# EAGLE board ScannerControlsBreakout (EAGLE 6.3)
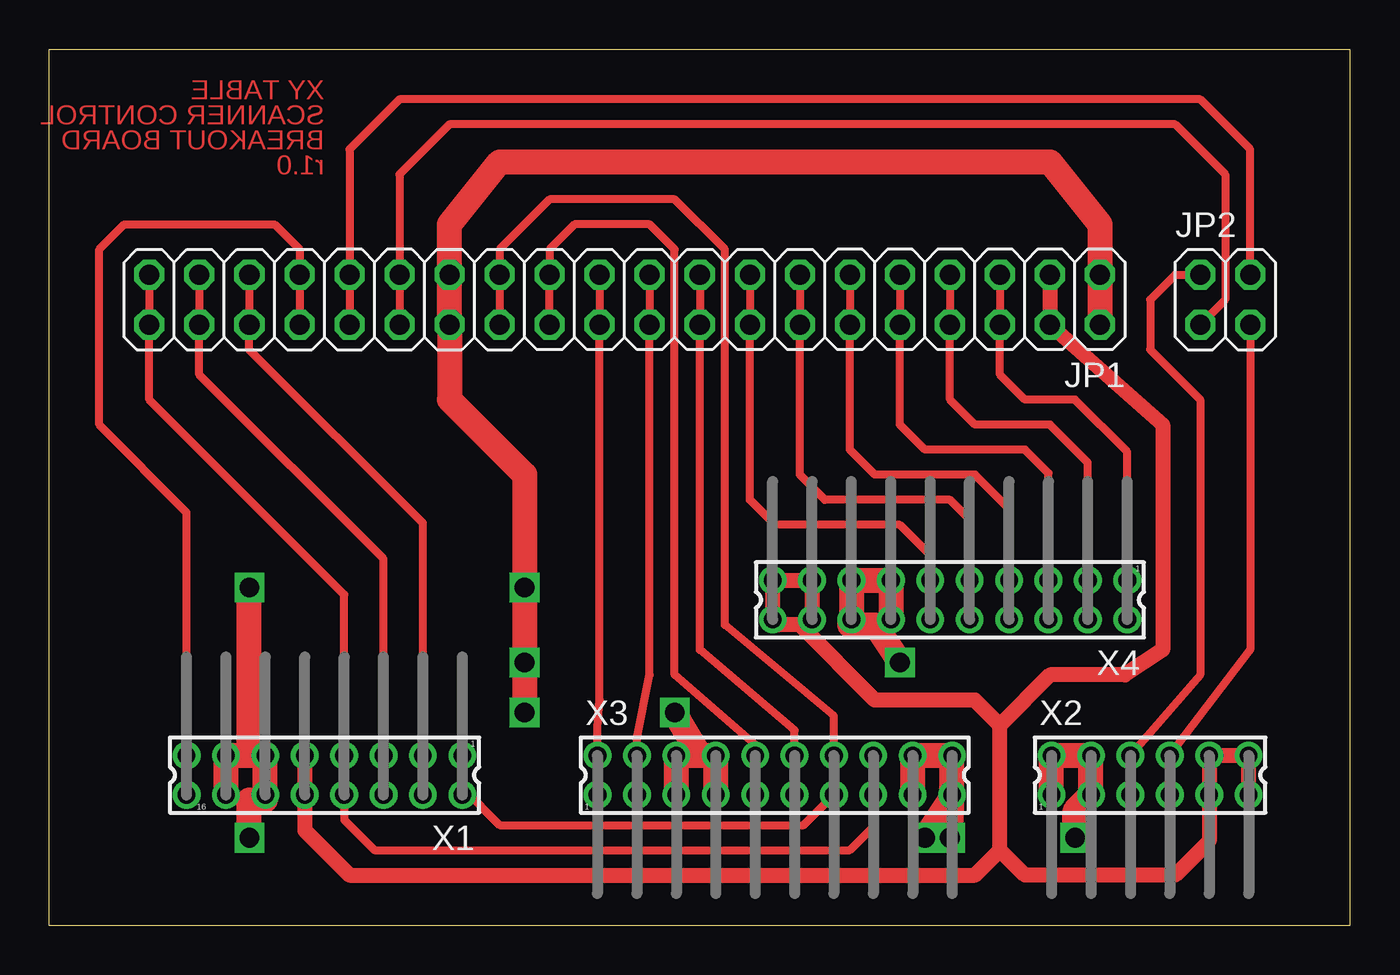
[diagram p0: board, top side]
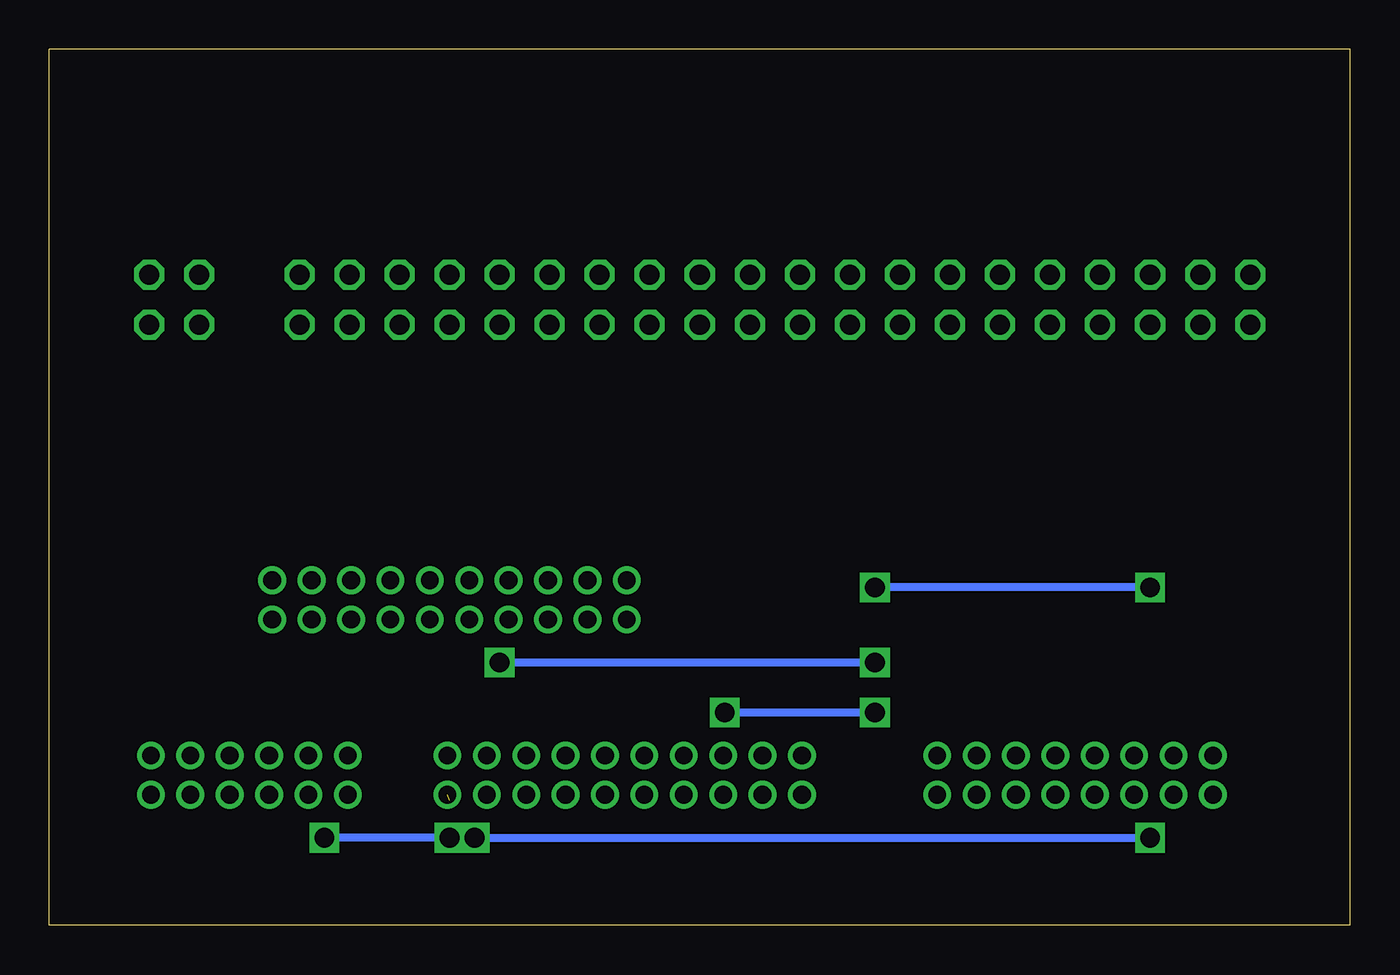
[diagram p1: board, bottom side, seen from below]

Size 66.04 x 44.45 mm. Coordinates in mm from the lower left corner, seen from the top.
Outline: 0,0 66.04,0 66.04,44.45 0,44.45 0,0
Copper layers (1*16): Top 0.035mm / dielectric 1.5mm / Bottom 0.035mm
Design rules "default *": minimum track width 10mil, minimum drill 24mil, track to track 8mil, track to pad 8mil, pad to pad 8mil, via to via 8mil, smd to smd 8mil, copper to edge 40mil, drill to drill 8mil, minimum pad ring 10mil, minimum via ring 10mil, stop-mask expansion 5mil, vias tented up to drill 0mil, thermal gap 10mil

## Footprints (pad centres in the part's own frame; a part is rotated, then mirrored left to right if it is on the bottom)
2X20 = drill 1.016 octagon: 1 -24.13,-1.27; 2 -24.13,1.27; 3 -21.59,-1.27; 4 -21.59,1.27; 5 -19.05,-1.27; 6 -19.05,1.27; 7 -16.51,-1.27; 8 -16.51,1.27; 9 -13.97,-1.27; 10 -13.97,1.27; 11 -11.43,-1.27; 12 -11.43,1.27; 13 -8.89,-1.27; 14 -8.89,1.27; 15 -6.35,-1.27; 16 -6.35,1.27; 17 -3.81,-1.27; 18 -3.81,1.27; 19 -1.27,-1.27; 20 -1.27,1.27; 21 1.27,-1.27; 22 1.27,1.27; 23 3.81,-1.27; 24 3.81,1.27; 25 6.35,-1.27; 26 6.35,1.27; 27 8.89,-1.27; 28 8.89,1.27; 29 11.43,-1.27; 30 11.43,1.27; 31 13.97,-1.27; 32 13.97,1.27; 33 16.51,-1.27; 34 16.51,1.27; 35 19.05,-1.27; 36 19.05,1.27; 37 21.59,-1.27; 38 21.59,1.27; 39 24.13,-1.27; 40 24.13,1.27
2X02 = drill 1.016 octagon: 1 -1.27,-1.27; 2 -1.27,1.27; 3 1.27,-1.27; 4 1.27,1.27
332-16 = drill 0.9 pad 1.27: 1 -7,-1; 2 -7,1; 3 -5,-1; 4 -5,1; 5 -3,-1; 6 -3,1; 7 -1,-1; 8 -1,1; 9 1,-1; 10 1,1; 11 3,-1; 12 3,1; 13 5,-1; 14 5,1; 15 7,-1; 16 7,1
332-12 = drill 0.9 pad 1.27: 1 -5,-1; 2 -5,1; 3 -3,-1; 4 -3,1; 5 -1,-1; 6 -1,1; 7 1,-1; 8 1,1; 9 3,-1; 10 3,1; 11 5,-1; 12 5,1
332-20 = drill 0.9 pad 1.27: 1 -9,-1; 2 -9,1; 3 -7,-1; 4 -7,1; 5 -5,-1; 6 -5,1; 7 -3,-1; 8 -3,1; 9 -1,-1; 10 -1,1; 11 1,-1; 12 1,1; 13 3,-1; 14 3,1; 15 5,-1; 16 5,1; 17 7,-1; 18 7,1; 19 9,-1; 20 9,1

## Placement (x,y rotation side)
JP1  [2X20]  29.21,31.75 180 top
JP2  [2X02]  59.69,31.75 0 top
X1  332-16  [332-16]  13.97,7.62 180 top
X2  332-12  [332-12]  55.88,7.62 0 top
X3  332-20  [332-20]  36.83,7.62 0 top
X4  332-20  [332-20]  45.72,16.51 180 top

## Library data of the parts
JP1 JP2 = pinhead
X1-X4 = con-garry

## Nets
+5V: JP1.3 JP1.4 X1.9 X1.10 X2.9 X2.10 X2.11 X2.12 X4.17 X4.18 X4.19 X4.20
DOWN: JP1.35 JP1.36 X1.3 X1.4
GND: JP1.1 JP1.2 JP1.27 JP1.28 X1.11 X1.12 X1.13 X1.14 X2.1 X2.2 X2.3 X2.4 X3.5 X3.6 X3.7 X3.8 X3.17 X3.18 X3.19 X3.20 X4.13 X4.14 X4.15 X4.16
LEFT: JP1.25 JP1.26 X1.1 X1.2 X3.13 X3.14
N$1: JP2.3 X2.7 X2.8
N$6: JP1.15 JP1.16 X4.11 X4.12
N$7: JP1.13 JP1.14 X4.9 X4.10
N$8: JP1.11 JP1.12 X4.7 X4.8
N$10: JP1.7 JP1.8 X4.3 X4.4
N$16: JP1.31 JP1.32 JP2.4
N$23: JP1.29 JP1.30 JP2.1
N$31: JP2.2 X2.5 X2.6
N$35: JP1.21 JP1.22 X3.1 X3.2
N$36: JP1.19 JP1.20 X3.3 X3.4
N$39: JP1.23 JP1.24 X3.9 X3.10
N$40: JP1.17 JP1.18 X3.11 X3.12
N$45: JP1.5 JP1.6 X4.1 X4.2
N$47: JP1.9 JP1.10 X4.5 X4.6
RIGHT: JP1.39 JP1.40 X1.7 X1.8 X3.15 X3.16
RST: JP1.33 JP1.34 X1.15 X1.16
UP: JP1.37 JP1.38 X1.5 X1.6

## Tracks (layer width: path | path; a pad name or v marks a point on that pad's centre or on a via)
+5V
  Top 0.406: X1.10 X1.9 | X2.9 X2.10 | 36.99,15.24 X4.20
  Top 0.762: JP1.3 JP1.4 56.52,25.4 56.52,13.97 54.61,12.7 50.8,12.7 48.26,10.16 | X4.20 X4.19 X4.17 X4.18 | X2.11 X2.12 X2.10 58.88,4.27 57.15,2.54 49.53,2.54 48.26,3.81 | X1.9 12.97,4.81 15.24,2.54 46.99,2.54 48.26,3.81 | 48.26,3.81 48.26,10.16 | 48.26,10.16 46.99,11.43 41.91,11.43 38.1,15.24 36.99,15.24
DOWN
  Top 0.406: JP1.35 JP1.36 10.16,29.21 18.97,20.4 X1.4 X1.3
GND  (via drill 1)  (1 unrouted)
  Top 0.406: X4.15 40.72,15.32 40.64,15.24 | 10.97,6.35 X1.12
  Top 1.27: JP1.28 JP1.27 | JP1.2 JP1.1 53.34,35.56 50.8,38.73 22.86,38.73 20.32,35.56 JP1.28 | X1.14 X1.13 10.16,8.62 | X1.12 X1.11 10.16,8.62 | X3.5 X3.6 33.02,8.62 | X3.17 X3.18 X3.20 X3.19 v45.72,4.45 | X3.7 X3.8 33.02,8.62 | X4.16 X4.15 X4.13 X4.14 | X2.1 X2.2 X2.4 X2.3 52.07,5.81 v52.07,4.45 | 40.64,15.24 41.91,15.24 v43.18,13.34 | 10.16,8.62 v10.16,17.14 | v24.13,10.79 v24.13,13.34 v24.13,17.14 24.13,22.86 20.32,26.67 JP1.28 | v31.75,10.79 33.02,8.62 | v44.45,4.45 45.72,6.35 | v10.16,4.45 10.16,6.35 10.97,6.35
  Bottom 0.406: v24.13,10.79 v31.75,10.79 | v10.16,17.14 v24.13,17.14 | v43.18,13.34 v24.13,13.34 | v44.45,4.45 v10.16,4.45 | v45.72,4.45 v52.07,4.45
LEFT
  Top 0.406: JP1.26 JP1.25 22.86,34.29 25.4,36.83 31.75,36.83 34.29,34.29 34.29,15.24 39.83,10.62 X3.14 X3.13 38.29,5.08 22.86,5.08 20.97,6.97 | 20.97,6.97 X1.2 | X1.1 20.97,6.97
N$1
  Top 0.406: X2.7 X2.8 60.96,13.97 JP2.3
N$6
  Top 0.406: JP1.15 JP1.16 35.56,21.59 36.83,20.32 43.18,20.32 44.72,18.78 X4.11 X4.12
N$7
  Top 0.406: JP1.13 JP1.14 38.1,22.86 39.37,21.59 45.72,21.59 46.72,20.59 X4.9 X4.10
N$8
  Top 0.406: JP1.11 JP1.12 40.64,24.13 41.91,22.86 46.99,22.86 48.72,21.13 X4.7 X4.8
N$10
  Top 0.406: JP1.7 JP1.8 45.72,26.67 46.99,25.4 50.8,25.4 52.72,23.48 X4.3 X4.4
N$16
  Top 0.406: JP1.32 JP1.31 15.24,39.37 17.78,41.91 58.42,41.91 60.96,39.37 JP2.4
N$23
  Top 0.406: JP1.30 JP1.29 17.78,38.1 20.32,40.64 57.15,40.64 59.69,38.1 59.69,31.75 JP2.1
N$31
  Top 0.406: X2.5 X2.6 58.42,12.7 58.42,26.67 55.88,29.21 55.88,31.75 57.15,33.02 JP2.2
N$35
  Top 0.406: JP1.21 JP1.22 27.94,11.43 27.83,10.05 X3.2 X3.1
N$36
  Top 0.406: JP1.19 JP1.20 30.48,12.7 29.83,9.51 X3.4 X3.3
N$39
  Top 0.406: JP1.24 JP1.23 25.4,34.29 26.67,35.56 30.48,35.56 31.75,34.29 31.75,12.7 35.83,9.16 X3.10 X3.9
N$40
  Top 0.406: JP1.17 JP1.18 33.02,13.97 37.83,9.89 X3.12 X3.11
N$45
  Top 0.406: JP1.5 JP1.6 48.26,27.94 49.53,26.67 52.07,26.67 54.72,24.02 X4.1 X4.2
N$47
  Top 0.406: JP1.9 JP1.10 43.18,25.4 44.45,24.13 49.53,24.13 50.72,22.94 X4.5 X4.6
RIGHT
  Top 0.406: JP1.39 JP1.40 5.08,26.67 14.97,16.78 X1.7 | X1.8 X1.7 | X3.16 X3.15 41.91,6.54 41.91,5.08 40.64,3.81 16.51,3.81 14.97,5.35 X1.7
RST
  Top 0.406: JP1.34 JP1.33 12.7,34.29 11.43,35.56 3.81,35.56 2.54,34.29 2.54,25.4 6.97,20.94 X1.15 X1.16
UP
  Top 0.406: JP1.37 JP1.38 7.62,27.94 16.97,18.59 X1.6 X1.5

## Text on the board
Top: XY TABLE | SCANNER CONTROL | BREAKOUT BOARD | r1.0